# EAGLE board Flowmeter_lpc1113.job (EAGLE 6.3)
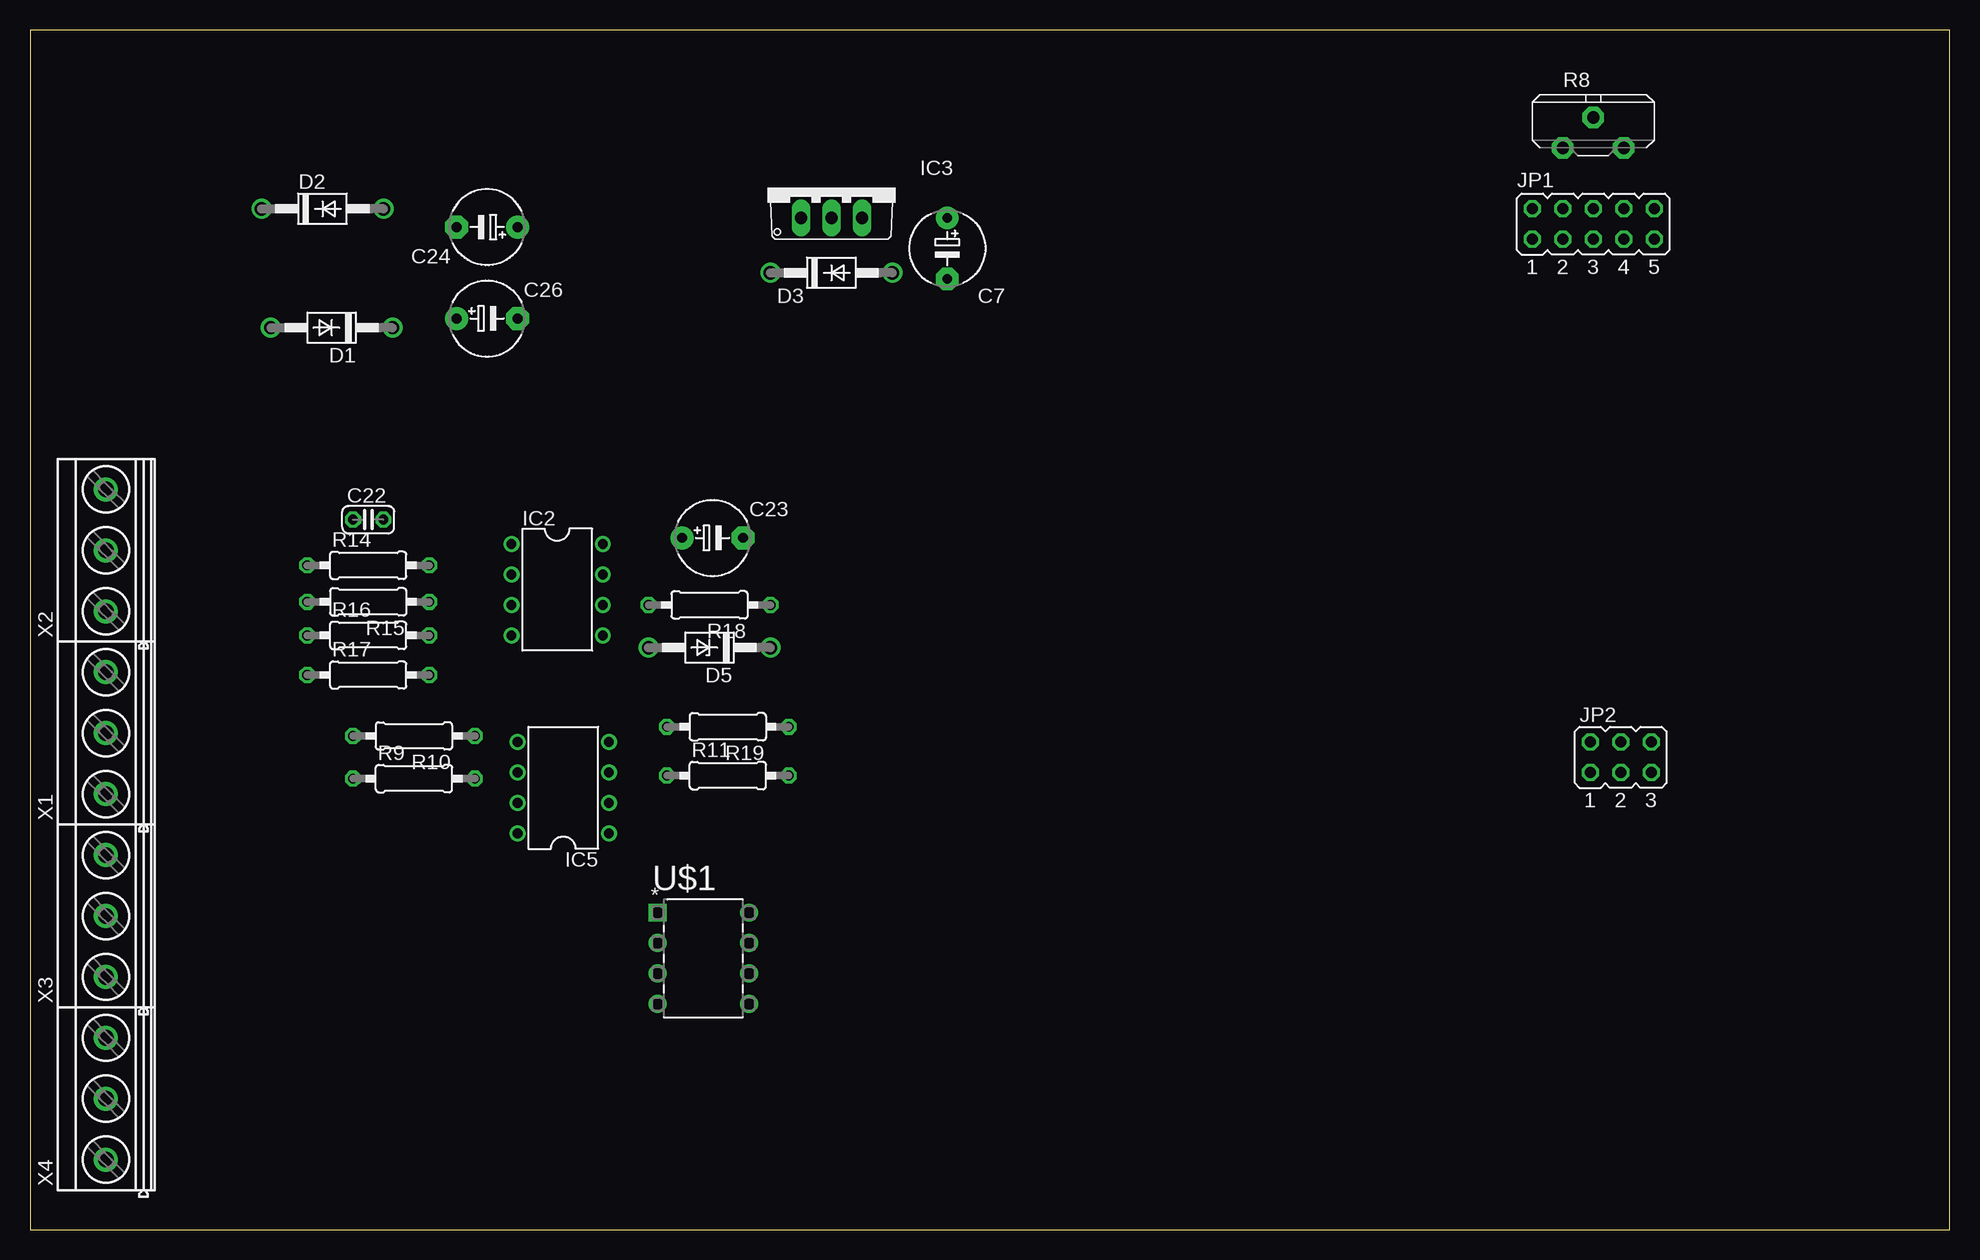
[diagram p0: board, top side]
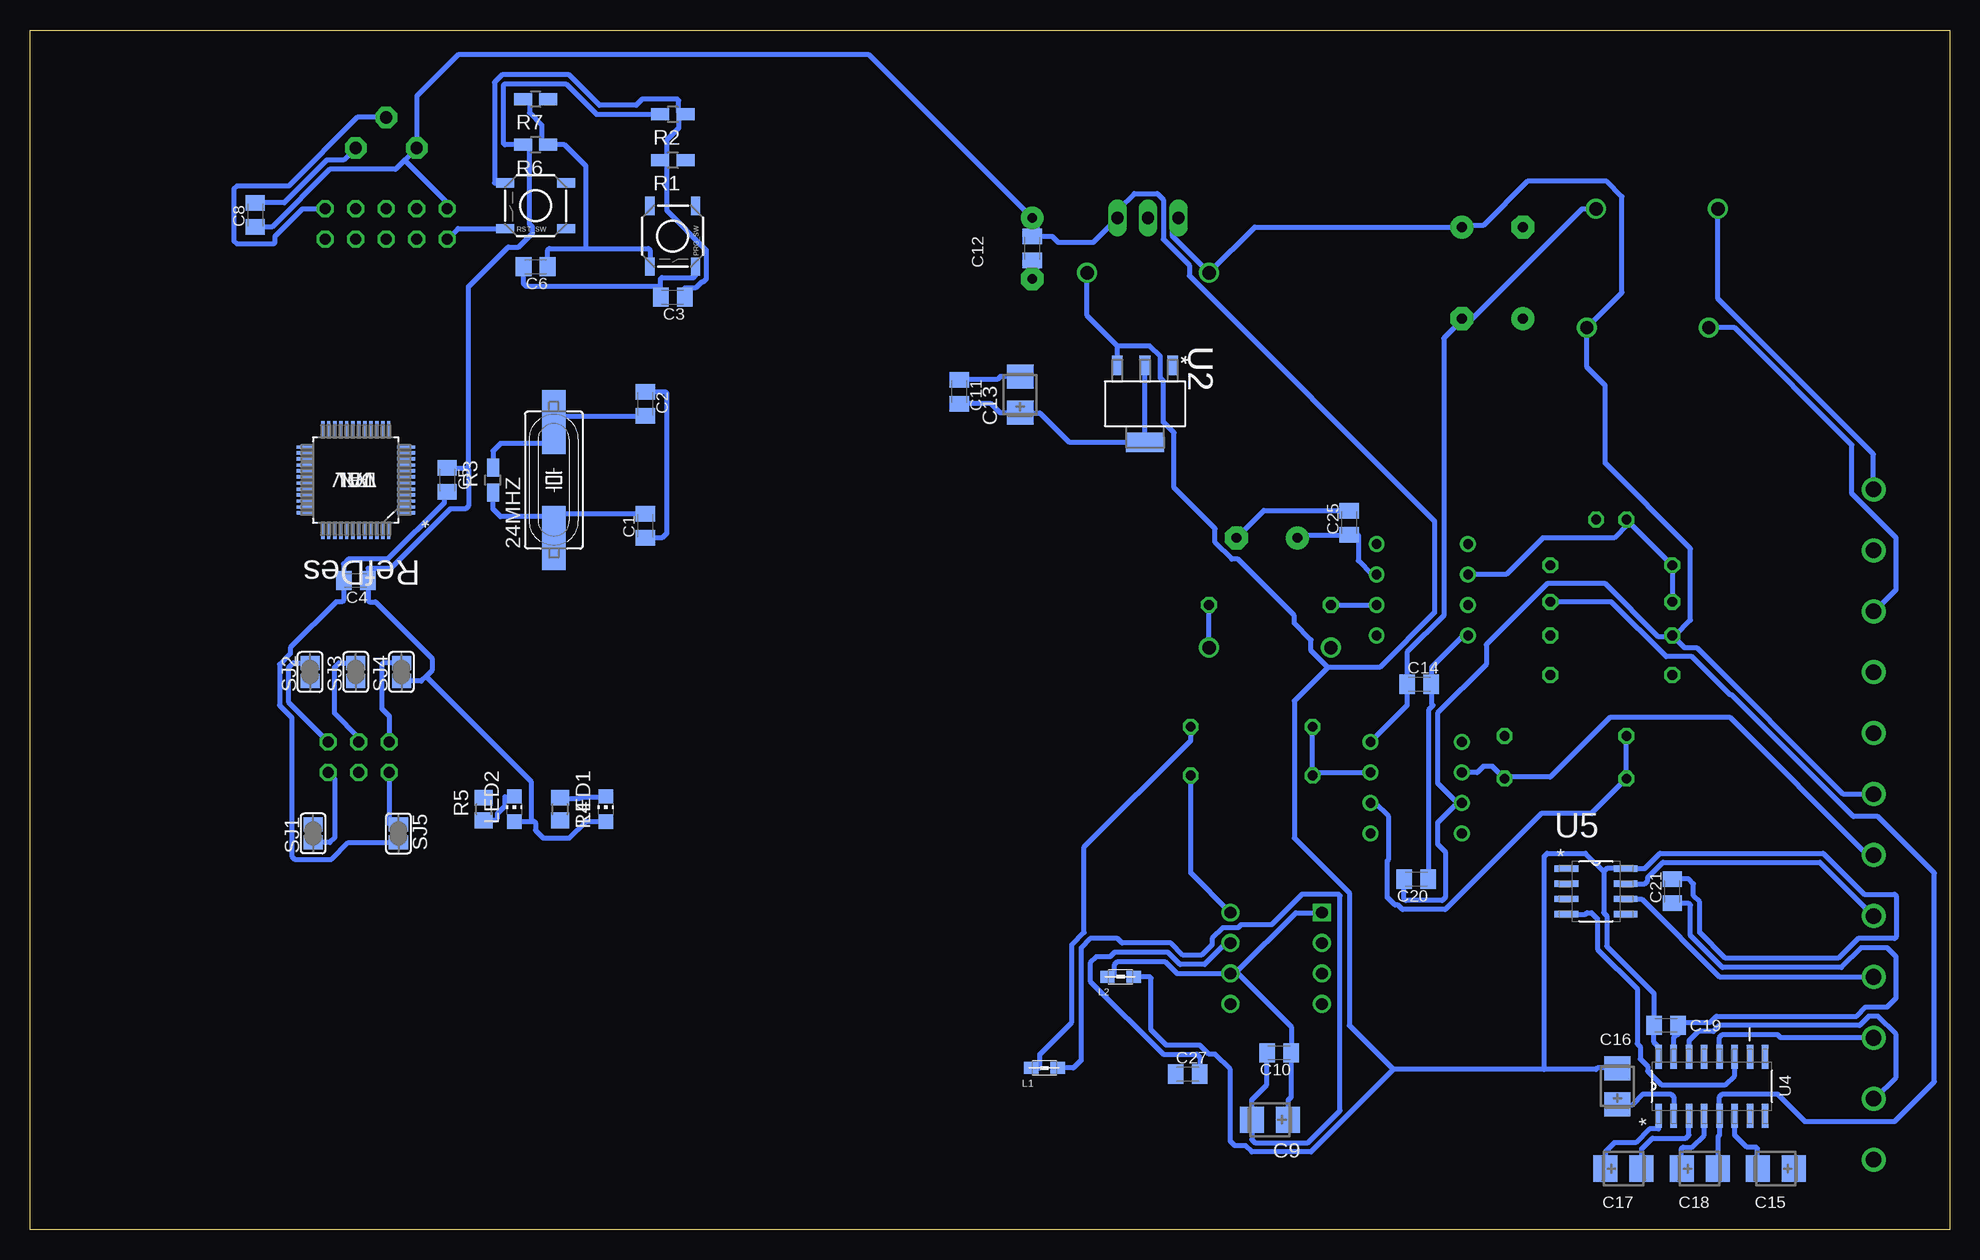
[diagram p1: board, bottom side, seen from below]

Size 160 x 100 mm. Coordinates in mm from the lower left corner, seen from the top.
Outline: 0,0 160,0 160,100 0,100 0,0
Copper layers (1*16): Top 0.035mm / dielectric 1.5mm / Bottom 0.035mm
Design rules "default *": minimum track width 16mil, minimum drill 24mil, track to track 12mil, track to pad 12mil, pad to pad 12mil, via to via 12mil, smd to smd 12mil, copper to edge 40mil, drill to drill 8mil, minimum pad ring 10mil, minimum via ring 8mil, stop-mask expansion 4mil, vias tented up to drill 0mil, thermal gap 10mil

## Footprints (pad centres in the part's own frame; a part is rotated, then mirrored left to right if it is on the bottom)
HC49UP = smd 5.334 x 1.93: 1 -4.826,0; 2 4.826,0
C0805K = smd 1.3 x 1.6: 1 -1,0; 2 1,0
E5-6 = drill 0.813 pad 1.905: + -2.54,0 | drill 0.813 pad 1.905 octagon: - 2.54,0
CT3528 = smd 2 x 2.2: + -1.5,0; - 1.5,0
C025-024X044 = drill 0.813 octagon: 1 -1.27,0; 2 1.27,0
DO41-10 = drill 1.118: A 5.08,0; C -5.08,0
DO41Z10 = drill 1.118: A 5.08,0; C -5.08,0
DIL08 = drill 0.813 pad 1.27: 1 -3.81,-3.81; 2 -1.27,-3.81; 3 1.27,-3.81; 4 3.81,-3.81; 5 3.81,3.81; 6 1.27,3.81; 7 -1.27,3.81; 8 -3.81,3.81
TO220V = drill 1.016 long: 1 -2.54,-2.54; 2 0,-2.54; 3 2.54,-2.54
JP5Q = drill 0.914 octagon: 1 -5.08,-1.27; 2 -5.08,1.27; 3 -2.54,-1.27; 4 -2.54,1.27; 5 0,-1.27; 6 0,1.27; 7 2.54,-1.27; 8 2.54,1.27; 9 5.08,-1.27; 10 5.08,1.27
JP3Q = drill 0.914 octagon: 1 -2.54,-1.27; 2 -2.54,1.27; 3 0,-1.27; 4 0,1.27; 5 2.54,-1.27; 6 2.54,1.27
0805 = smd 1.2 x 1: 1 -1.1,0; 2 1.1,0
CHIP-LED0805 = smd 1.2 x 1.2: A 0,-1.05; C 0,1.05
TACTILE_SWITCH_SMD = smd 1.524 x 0.762: 1 -2.54,1.905; 2 2.54,1.905; 3 -2.54,-1.905; 4 2.54,-1.905
R0805W = smd 1.5 x 1: 1 -1.052,0; 2 1.052,0
R0805 = smd 1.3 x 1.5: 1 -0.95,0; 2 0.95,0
PT-10S = drill 1.016 pad 1.778 octagon: 1 -2.54,-1.27; 2 2.54,-1.27; 3 0,1.27
0207/10 = drill 0.813 octagon: 1 -5.08,0; 2 5.08,0
SJ = smd 1.168 x 1.6: 1 -0.762,0; 2 0.762,0
QFP50P900X900X160-48N = smd 1.473 x 0.279: 1 -4.191,2.743; 2 -4.191,2.261; 3 -4.191,1.753; 4 -4.191,1.245; 5 -4.191,0.762; 6 -4.191,0.254; 7 -4.191,-0.254; 8 -4.191,-0.762; 9 -4.191,-1.245; 10 -4.191,-1.753; 11 -4.191,-2.261; 12 -4.191,-2.743; 25 4.191,-2.743; 26 4.191,-2.261; 27 4.191,-1.753; 28 4.191,-1.245; 29 4.191,-0.762; 30 4.191,-0.254; 31 4.191,0.254; 32 4.191,0.762; 33 4.191,1.245; 34 4.191,1.753; 35 4.191,2.261; 36 4.191,2.743 | smd 0.279 x 1.473: 13 -2.743,-4.191; 14 -2.261,-4.191; 15 -1.753,-4.191; 16 -1.245,-4.191; 17 -0.762,-4.191; 18 -0.254,-4.191; 19 0.254,-4.191; 20 0.762,-4.191; 21 1.245,-4.191; 22 1.753,-4.191; 23 2.261,-4.191; 24 2.743,-4.191; 37 2.743,4.191; 38 2.261,4.191; 39 1.753,4.191; 40 1.245,4.191; 41 0.762,4.191; 42 0.254,4.191; 43 -0.254,4.191; 44 -0.762,4.191; 45 -1.245,4.191; 46 -1.753,4.191; 47 -2.261,4.191; 48 -2.743,4.191
SOT230P700X180-4N = smd 1.626 x 0.889: 1 -3.2,2.311; 2 -3.2,0; 3 -3.2,-2.311 | smd 1.626 x 3.175: 4 3.2,0
SOIC127P600X175-16N = smd 1.981 x 0.533: 1 -2.464,4.445; 2 -2.464,3.175; 3 -2.464,1.905; 4 -2.464,0.635; 5 -2.464,-0.635; 6 -2.464,-1.905; 7 -2.464,-3.175; 8 -2.464,-4.445; 9 2.464,-4.445; 10 2.464,-3.175; 11 2.464,-1.905; 12 2.464,-0.635; 13 2.464,0.635; 14 2.464,1.905; 15 2.464,3.175; 16 2.464,4.445
SOIC127P600X175-8N = smd 1.981 x 0.533: 1 -2.464,1.905; 2 -2.464,0.635; 3 -2.464,-0.635; 4 -2.464,-1.905; 5 2.464,-1.905; 6 2.464,-0.635; 7 2.464,0.635; 8 2.464,1.905
DIP254P762X432-8 = drill 0.991 square: 1 -7.62,7.62 | drill 0.991: 2 -7.62,5.08; 3 -7.62,2.54; 4 -7.62,0; 5 0,0; 6 0,2.54; 7 0,5.08; 8 0,7.62
MKDSN1,5/3-5,08 = drill 1.3 pad 2: 1 -7.641,0.025; 2 -2.561,0.025; 3 2.519,0.025

## Placement (x,y rotation side)
24MHZ  12MHz  [HC49UP]  116.33,62.48 90 bottom
C1  18p  [C0805K]  108.71,58.67 90 bottom
C2  18p  [C0805K]  108.71,68.83 270 bottom
C3  18p  [C0805K]  106.43,77.72 180 bottom
C4  100n  [C0805K]  132.84,54.1 180 bottom
C5  100n  [C0805K]  125.22,62.48 270 bottom
C6  18p  [C0805K]  117.86,80.26 180 bottom
C7  10uF  [E5-6]  76.45,81.79 270 top
C8  100n  [C0805K]  141.22,84.58 90 bottom
C9  10Âµ  [CT3528]  56.64,9.14 180 bottom
C10  100n  [C0805K]  55.88,14.73 180 bottom
C11  100n  [C0805K]  82.55,69.85 270 bottom
C12  100n  [C0805K]  76.45,81.79 90 bottom
C13  10Âµ  [CT3528]  77.47,69.6 90 bottom
C14  100n  [C0805K]  44.2,45.47 0 bottom
C15  [CT3528]  14.48,5.08 180 bottom
C16  [CT3528]  27.69,11.94 90 bottom
C17  [CT3528]  27.18,5.08 0 bottom
C18  [CT3528]  20.83,5.08 0 bottom
C19  100n  [C0805K]  23.62,17.02 180 bottom
C20  100n  [C0805K]  44.45,29.21 180 bottom
C21  100n  [C0805K]  23.11,28.19 90 bottom
C22  100n  [C025-024X044]  28.19,59.18 0 top
C23  100uF/60V  [E5-6]  56.9,57.66 0 top
C24  100uF/60V  [E5-6]  38.1,83.57 180 top
C25  100n  [C0805K]  50.04,58.93 90 bottom
C26  100uF/60V  [E5-6]  38.1,75.95 0 top
C27  100n  [C0805K]  63.5,12.95 0 bottom
D1  1N4004  [DO41-10]  25.15,75.18 180 top
D2  1N4004  [DO41-10]  24.38,85.09 0 top
D3  1N4004  [DO41-10]  66.8,79.76 0 top
D5  3.3V  [DO41Z10]  56.64,48.51 180 top
IC2  OP07CN  [DIL08]  43.94,53.34 270 top
IC3  7805TV  [TO220V]  66.8,86.87 0 top
IC5  OP07CN  [DIL08]  44.45,36.83 90 top
JP1  [JP5Q]  130.3,83.82 0 top
JP2  [JP3Q]  132.59,39.37 0 top
L1  WURTH ELEKTRONIK - 742792095  [0805]  75.44,13.46 0 bottom
L2  WURTH ELEKTRONIK - 742792095  [0805]  69.09,21.08 0 bottom
LED1  [CHIP-LED0805]  112.01,35.05 0 bottom
LED2  [CHIP-LED0805]  119.63,35.05 0 bottom
PRG_SW  [TACTILE_SWITCH_SMD]  106.43,82.8 270 bottom
R1  10k  [R0805W]  106.43,89.15 180 bottom
R2  10k  [R0805W]  106.43,92.96 180 bottom
R3  1M  [R0805W]  121.41,62.48 90 bottom
R4  [R0805]  115.82,35.05 270 bottom
R5  [R0805]  122.17,35.05 90 bottom
R6  10k  [R0805W]  117.86,90.42 180 bottom
R7  10k  [R0805W]  117.86,94.23 180 bottom
R8  [PT-10S]  130.3,91.44 0 top
R9  10k  [0207/10]  32,37.59 0 top
R10  10k  [0207/10]  32,41.15 180 top
R11  10k  [0207/10]  58.17,37.85 0 top
R14  10k  [0207/10]  28.19,55.37 0 top
R15  10k  [0207/10]  28.19,52.32 180 top
R16  10k  [0207/10]  28.19,49.53 0 top
R17  10k  [0207/10]  28.19,46.23 0 top
R18  10k  [0207/10]  56.64,52.07 180 top
R19  10k  [0207/10]  58.17,41.91 180 top
RST_SW  [TACTILE_SWITCH_SMD]  117.86,85.34 180 bottom
SJ1  [SJ]  136.4,33.02 90 bottom
SJ2  [SJ]  136.65,46.48 90 bottom
SJ3  [SJ]  132.84,46.48 90 bottom
SJ4  [SJ]  129.03,46.48 90 bottom
SJ5  [SJ]  129.29,33.02 270 bottom
U1  LPC1113FBD48/302,1  [QFP50P900X900X160-48N]  132.84,62.48 180 bottom
U2  LD1117S33CTR  [SOT230P700X180-4N]  67.06,68.83 270 bottom
U4  MAX232ACSE+  [SOIC127P600X175-16N]  19.81,11.94 90 bottom
U5  MAX485CSA+  [SOIC127P600X175-8N]  29.46,28.19 0 bottom
U$1  MCP4921-E/P  [DIP254P762X432-8]  59.94,18.8 0 top
X1  MKDSN1,5/3-5,08  [MKDSN1,5/3-5,08]  6.35,43.94 90 top
X2  MKDSN1,5/3-5,08  [MKDSN1,5/3-5,08]  6.35,59.18 90 top
X3  MKDSN1,5/3-5,08  [MKDSN1,5/3-5,08]  6.35,28.7 90 top
X4  MKDSN1,5/3-5,08  [MKDSN1,5/3-5,08]  6.35,13.46 90 top

## Library data of the parts
24MHZ = SparkFun2
C1-C27 R1-R8 R14-R18 = rcl
D1-D3 = diode
D5 = ng
IC2 IC3 IC5 = linear
JP1 JP2 SJ1-SJ5 = jumper
L1 L2 = wuerth-elektronik
LED1 LED2 = led
PRG_SW RST_SW = SparkFun1
R9-R11 R19 = resistor
U1 = lpc1113; MPN: LPC1113FBD48/302,1; OC_FARNELL: 2072186; OC_NEWARK: 83T7137; PACKAGE: LQFP-48; SUPPLIER: NXP
U2 = ld1117; MPN: LD1117S33CTR; OC_FARNELL: 2253482; OC_NEWARK: 89K0626; PACKAGE: SOT223-3; SUPPLIER: STMicroelectronics
U4 = maxim; MPN: MAX232ACSE+; OC_FARNELL: 9724362; OC_NEWARK: 52K5506; PACKAGE: SOIC-16; SUPPLIER: Maxim
U5 = maxim; MPN: MAX485CSA+; OC_FARNELL: 9725954; OC_NEWARK: 68K4795; PACKAGE: SOIC-8; SUPPLIER: Maxim
U$1 = microchip; MPN: MCP4921-E/P; OC_FARNELL: 1332112; OC_NEWARK: 08J8743; PACKAGE: DIP-8; SUPPLIER: Microchip
X1-X4 = con-phoenix-508; MPN: SMKDSN1,5/3-5,08; OC_FARNELL: 1792904; OC_NEWARK: 70R0299

## Nets
5V: C7.+ C8.1 C12.2 C16.- C19.2 C21.2 D3.A IC3.3 JP1.2 L2.2 R8.1 U2.3 U4.16 U5.8
5V1: C27.1
+12V: C20.2 C24.+ D1.C D3.C IC3.1 IC5.7 R16.1 X1.1
-12V: C14.1 C26.- D2.A IC5.4
/BOOTLOADER: R7.1 U1.4
/RESET: R1.1 SJ1.2 U1.3
DAC_VOUT: R11.2 U$1.8
GND: C1.1 C2.1 C3.2 C4.2 C5.2 C6.2 C7.- C8.2 C11.1 C12.1 C13.- C14.2 C15.+ C19.1 C20.1 C21.1 C22.2 C23.- C24.- C25.2 C26.+ D5.A IC2.4 IC3.2 JP1.1 L1.1 PRG_SW.2 R8.2 R10.1 R14.2 R17.2 R19.1 RST_SW.2 SJ5.2 U1.5 U1.41 U2.1 U4.15 U5.5 X1.3 X2.2 X4.1
GND1: C27.2 U$1.7
LCD_CONT: JP1.10 R8.3
LCD_D4: JP1.3 U1.1
LCD_D5: JP1.4 U1.11
LCD_D6: JP1.5 U1.12
LCD_D7: JP1.6 U1.24
LCD_EN: JP1.7 U1.43
LCD_R/W: JP1.8 U1.37
LCD_RS: JP1.9 U1.36
LDAC: U1.48 U$1.5
LED1: R4.2 U1.21
LED2: R5.2 U1.20
N$1: LED1.C R4.1
N$2: LED2.C R5.1
N$3: C9.- C10.2 L1.2
N$4: C3.1 R1.2 R2.1 RST_SW.4
N$5: C6.1 PRG_SW.4 R6.1 R7.2
N$6: JP2.5 SJ1.1
N$7: JP2.2 SJ4.2
N$8: JP2.4 SJ3.2
N$9: JP2.6 SJ2.2
N$10: JP2.1 SJ5.1
N$11: C9.+ C10.1 L2.1 U$1.1 U$1.6
N$12: U4.14 X4.2
N$13: U4.12 X4.3
N$14: C17.+ U4.1
N$15: C22.1 IC2.2 R14.1 R15.2
N$16: IC5.2 R9.1 R10.2
N$17: IC5.3 R11.1 R19.2
N$20: D2.C X2.3
N$21: D1.A X2.1
N$22: C23.+ C25.1 IC2.7
N$24: C17.- U4.3
N$26: C18.+ U4.4
N$27: C18.- R15.1 U4.5
N$28: C16.+ U4.2
N$29: C15.- U4.6
N$33: IC5.6 R9.2 X3.3
N$34: U5.6 X3.1
N$36: U5.7 X3.2
N$37: IC2.6 R18.2
N$43: C11.2 C13.+ U2.2 U2.4
N/C: JP2.3
PULSE: D5.C R18.1
RS485_RX_EN: U1.15 U5.2
RS485_TX_EN: U1.14 U5.3
SENSOR_SIGNAL: IC2.3 R16.2 R17.1 X1.2
SPI1_CS: U1.2 U$1.2
SPI1_MISO: U1.26
SPI1_MOSI: U1.38 U$1.4
SPI1_SCK: U1.13 U$1.3
SWDCLK: SJ2.1 U1.29
SWDIO: SJ3.1 U1.39
UART_RX: U1.46 U4.13 U5.1
UART_TX: U1.47 U4.11 U5.4
VCC: C4.1 C5.1 LED1.A LED2.A R2.2 R6.2 SJ4.1 U1.8 U1.44
XTAL_IN: 24MHZ.1 C1.2 R3.1 U1.6
XTAL_OUT: 24MHZ.2 C2.2 R3.2 U1.7

## Tracks (layer width: path | path; a pad name or v marks a point on that pad's centre or on a via)
5V
  Bottom 0.406: U4.16 24.26,15.24 24.64,15.62 24.64,17.02 C19.2 24.64,17.14 24.64,19.68 28.57,23.62 28.57,26.16 28.83,26.42 28.83,29.84 | C21.2 23.11,29.21 21.72,29.21 21.34,28.83 21.34,27.81 20.83,27.3 20.83,24.77 18.67,22.61 9.27,22.61 7.62,24.26 4.57,24.26 4.45,24.38 4.45,27.81 4.57,27.94 7.11,27.94 10.54,31.37 24.13,31.37 25.4,30.1 U5.8 28.57,30.1 28.83,29.84 | L2.2 66.67,21.08 66.55,20.95 66.55,16.64 65.28,15.37 62.48,15.37 61.72,14.61 61.21,14.61 59.94,13.34 59.94,7.37 59.56,6.99 58.67,6.99 58.17,6.48 53.21,6.48 46.35,13.34 | 33.78,13.34 29.46,13.34 29.34,13.46 27.69,13.46 C16.- | 33.78,13.34 46.35,13.34 | 28.83,29.84 30.35,31.37 33.53,31.37 33.78,31.11 33.78,13.34 | 128.78,89.15 R8.1 127.76,94.49 124.33,97.92 90.04,97.92 C7.+ 76.07,83.95 76.07,82.8 76.45,82.8 C12.2 75.95,82.8 74.8,82.8 74.3,82.3 71.37,82.3 IC3.3 69.22,84.45 69.22,85.09 67.94,86.36 66.04,86.36 65.53,85.85 65.53,82.55 63.37,80.39 63.37,79.5 42.93,59.05 42.93,51.44 47.5,46.86 51.82,46.86 | 128.78,89.15 129.54,88.39 135,88.39 139.83,83.57 141.22,83.57 C8.1 | JP1.2 125.22,85.6 128.78,89.15 | D3.A 71.88,76.2 69.34,73.66 | 69.34,73.66 69.34,72.14 U2.3 | 69.34,73.66 66.67,73.66 65.79,72.77 65.79,70.99 65.53,70.74 65.53,67.31 64.64,66.42 64.64,61.85 61.21,58.42 61.21,57.28 59.82,55.88 59.31,55.88 54.61,51.18 54.61,50.55 53.21,49.15 53.21,48.26 51.82,46.86 | 46.35,13.34 50.04,17.02 50.04,28.07 54.61,32.64 54.61,44.07 51.82,46.86
+12V
  Bottom 0.406: IC3.1 64.77,83.82 64.77,82.8 D3.C 57.91,83.57 C24.+ 40.51,83.69 38.86,83.69 35.18,87.38 28.57,87.38 27.3,86.11 27.3,78.11 D1.C 30.23,71.88 28.7,70.36 28.7,63.88 21.59,56.77 21.59,50.8 22.86,49.53 R16.1 | C20.2 45.47,29.21 45.47,27.56 45.34,27.43 42.29,27.43 42.04,27.69 42.04,31.5 42.67,32.13 42.67,33.91 41.02,35.56 IC5.7 41.15,35.69 42.67,37.21 42.67,43.05 38.61,47.12 38.61,48.77 33.53,53.85 28.7,53.85 24.26,49.4 23.24,49.4 R16.1 | R16.1 22.1,48.51 21.08,48.51 8.89,36.32 6.35,36.32 X1.1
-12V
  Bottom 0.406: IC5.4 45.21,43.69 45.21,45.47 C14.1 45.21,45.59 45.21,48.13 42.16,51.18 42.16,74.3 40.64,75.82 C26.- 39.75,75.95 30.61,85.09 D2.A
DAC_VOUT
  Bottom 0.406: R11.2 63.25,29.72 U$1.8
GND
  Bottom 0.406: C5.2 125.22,61.47 125.48,61.47 125.48,60.58 130.18,55.88 133.48,55.88 133.86,55.5 133.86,54.1 C4.2 133.86,53.98 133.86,52.45 133.99,52.32 134.49,52.32 138.3,48.51 138.3,48.01 139.19,47.12 139.19,43.69 138.18,42.67 138.18,31.11 137.92,30.86 134.87,30.86 133.48,32.26 SJ5.2 | C23.- 57.15,59.94 50.04,59.94 C25.2 | C7.- 76.07,79.63 76.07,80.77 76.45,80.77 C12.1 | C11.1 82.55,70.87 79.38,70.87 79.12,71.12 77.47,71.12 C13.- | PRG_SW.2 104.52,79.5 104.65,79.38 107.31,79.38 107.44,79.25 107.44,78.61 | 107.44,78.61 107.44,77.72 C3.2 | 107.44,78.61 118.62,78.61 118.87,78.87 118.87,80.26 C6.2 | C1.1 108.71,57.66 107.31,57.66 106.93,58.04 106.93,69.72 107.06,69.85 108.71,69.85 C2.1 | RST_SW.2 124.33,83.44 JP1.1 | R8.2 133.86,89.15 135.25,89.15 138.81,85.6 141.22,85.6 C8.2 | IC2.4 40.51,49.53 43.18,46.86 43.18,45.47 C14.2 43.18,45.34 43.18,43.81 43.05,43.69 43.43,43.31 43.43,29.21 C20.1 | U4.15 22.99,16 22.73,16.26 22.61,16.26 22.61,17.02 C19.1 22.73,17.14 22.61,17.27 19.94,17.27 19.43,17.78 7.75,17.78 6.99,18.54 5.21,18.54 4.45,19.3 4.45,22.73 5.21,23.5 7.37,23.5 9.02,21.84 18.92,21.84 21.59,24.51 21.59,27.05 21.72,27.18 23.11,27.18 C21.1 | R19.1 63.25,40.77 72.14,31.88 72.14,24.77 73.15,23.75 73.15,17.27 75.82,14.61 75.82,13.46 L1.1
GND1
  Bottom 0.406: U$1.7 60.33,23.88 62.1,22.1 64.14,22.1 65.15,23.11 69.6,23.11 69.98,22.73 71.12,22.73 71.63,22.23 71.63,20.7 65.53,14.61 62.74,14.61 62.48,14.35 62.48,12.95 C27.2
LCD_CONT
  Bottom 0.406: JP1.10 137.29,85.09 139.57,82.8 139.57,82.3 139.7,82.17 142.75,82.17 143,82.42 143,86.74 142.75,87 138.43,87 132.72,92.71 R8.3
N$1
  Bottom 0.406: LED1.C 112.01,36.07 114.05,36.07 114.17,35.94 115.82,35.94 R4.1
N$2
  Bottom 0.406: LED2.C 119.63,36.07 120.4,36.07 120.4,35.31 121.03,34.67 121.03,34.29 121.16,34.16 122.17,34.16 R5.1
N$3
  Bottom 0.406: C10.2 56.9,14.73 56.9,12.06 58.17,10.79 58.17,9.14 C9.- 58.17,9.02 58.17,7.49 57.91,7.24 53.47,7.24 50.8,9.91 50.8,27.81 50.93,27.94 53.98,27.94 56.52,25.4 59.05,25.4 59.31,25.15 60.58,25.15 61.47,24.26 61.47,23.75 62.36,22.86 63.88,22.86 64.9,23.88 68.96,23.88 69.34,24.26 71.63,24.26 72.39,23.5 72.39,14.1 73.03,13.46 L1.2
N$4
  Bottom 0.406: RST_SW.4 121.28,87.25 121.28,95.63 120.65,96.27 115.06,96.27 112.52,93.73 109.47,93.73 108.97,94.23 106.05,94.23 105.92,94.11 105.92,93.09 R2.1 105.79,92.96 105.92,92.84 105.92,91.82 106.93,90.81 106.93,89.28 107.06,89.15 R1.2 106.93,89.03 106.93,84.96 103.63,81.66 103.63,79.25 103.89,78.99 104.01,78.99 104.52,78.49 105.41,78.49 105.41,77.72 C3.1
N$5
  Bottom 0.406: R7.2 118.49,94.23 118.36,94.11 118.36,93.09 117.35,92.08 117.35,90.55 117.22,90.42 R6.1 115.44,90.42 113.67,88.65 113.67,81.79 | PRG_SW.4 108.33,81.66 108.46,81.79 113.67,81.79 | 113.67,81.79 116.71,81.79 116.84,81.66 116.84,80.26 C6.1
N$6
  Bottom 0.406: SJ1.1 135,32.26 134.62,32.64 134.62,37.59 JP2.5
N$7
  Bottom 0.406: JP2.2 130.05,42.8 130.68,43.43 130.68,47.12 130.56,47.24 SJ4.2
N$8
  Bottom 0.406: SJ3.2 134.24,47.24 134.62,46.86 134.62,43.05 132.59,41.02 JP2.4
N$9
  Bottom 0.406: SJ2.2 138.05,47.24 138.43,46.86 138.43,43.94 JP2.6
N$10
  Bottom 0.406: SJ5.1 130.05,33.78 JP2.1
N$11
  Bottom 0.406: C9.+ 55.12,9.14 55.12,10.79 54.86,11.05 54.86,14.73 C10.1 54.86,14.86 54.86,16.89 59.31,21.34 U$1.6 | U$1.6 64.39,21.34 65.41,22.35 69.34,22.35 69.6,22.1 69.6,21.21 69.72,21.08 L2.1 | U$1.1 54.48,26.42 59.44,21.46 59.82,21.46 U$1.6
N$12
  Bottom 0.406: U4.14 21.72,15.75 20.95,16.51 19.68,16.51 19.18,17.02 7.49,17.02 6.73,17.78 5.97,17.78 4.45,16.26 4.45,12.7 6.22,10.92 X4.2
N$13
  Bottom 0.406: U4.12 19.18,16 18.92,16.26 14.35,16.26 14.1,16 6.35,16 X4.3
N$14
  Bottom 0.406: U4.1 24.26,8.38 25.02,8.38 26.16,7.24 27.94,7.24 28.7,6.48 28.7,5.08 C17.+
N$15
  Bottom 0.406: R15.2 R14.1 C22.1 26.8,58.8 27.94,57.66 33.91,57.66 36.96,54.61 IC2.2
N$16
  Bottom 0.406: R10.2 R9.1 29.84,34.67 34.04,34.67 42.04,26.67 45.59,26.67 45.97,27.05 46.23,27.05 46.86,27.69 46.86,30.73 46.74,30.86 46.74,34.42 47.88,35.56 IC5.2
N$17
  Bottom 0.406: IC5.3 52.83,38.1 R11.1 R19.2
N$20
  Bottom 0.406: D2.C 19.3,77.6 6.35,64.64 6.35,61.72 X2.3
N$21
  Bottom 0.406: D1.A 17.91,75.18 8.13,65.41 8.13,61.34 4.45,57.66 4.45,53.34 6.22,51.56 X2.1
N$22
  Bottom 0.406: C23.+ 54.1,57.91 50.04,57.91 C25.1 49.91,57.91 49.28,57.91 49.28,55.75 48.13,54.61 IC2.7
N$24
  Bottom 0.406: U4.3 21.72,7.87 21.97,7.62 24.77,7.62 25.65,6.73 25.65,5.08 C17.-
N$26
  Bottom 0.406: U4.4 20.45,7.87 21.46,6.86 22.23,6.86 22.35,6.73 22.35,5.08 C18.+
N$27
  Bottom 0.406: R15.1 28.19,52.32 23.62,47.75 21.46,47.75 18.29,44.58 18.16,44.58 8,34.42 5.97,34.42 1.27,29.72 1.27,12.32 4.57,9.02 12.06,9.02 14.35,11.3 18.92,11.3 19.18,11.05 U4.5 19.18,7.87 19.3,7.75 19.3,5.08 C18.-
N$28
  Bottom 0.406: U4.2 22.99,11.05 23.24,11.3 25.53,11.3 26.42,10.41 27.69,10.41 C16.+
N$29
  Bottom 0.406: U4.6 17.91,7.87 16.89,6.86 16.13,6.86 16,6.73 16,5.08 C15.-
N$33
  Bottom 0.406: IC5.6 39.37,38.1 38.86,38.61 38.1,38.61 R9.2 36.96,37.72 33.27,37.72 28.32,42.67 18.29,42.67 6.86,31.24 6.35,31.24 X3.3
N$34
  Bottom 0.406: U5.6 25.65,27.56 19.18,21.08 6.35,21.08 X3.1
N$36
  Bottom 0.406: U5.7 25.4,28.83 25.15,29.08 25.15,29.34 23.88,30.61 10.79,30.61 6.35,26.16 X3.2
N$37
  Bottom 0.406: R18.2 IC2.6
N$43
  Bottom 0.406: C11.2 82.55,68.83 79.88,68.83 79.12,68.07 77.6,68.07 C13.+ 77.47,68.07 75.82,68.07 73.41,65.66 67.06,65.66 U2.4 U2.2
PULSE
  Bottom 0.406: D5.C R18.1
UART_TX
  Bottom 0.406: U4.11 17.91,12.83 18.67,12.06 24,12.06 25.15,13.21 25.15,13.59 25.78,14.22 25.78,15.24 26.04,15.49 26.04,20.07 29.34,23.37 29.34,25.91 29.84,26.42 30.23,26.42 30.35,26.29 U5.4
VCC
  Bottom 0.406: R2.2 112.78,92.96 115.32,95.5 120.4,95.5 120.52,95.38 120.52,90.55 120.4,90.42 R6.2 118.36,90.42 118.36,83.82 118.11,83.57 118.11,83.06 119.25,81.92 120.14,81.92 123.44,78.61 123.44,63.63 123.57,63.5 | 118.24,34.04 119.63,34.04 LED2.A | 118.24,34.04 117.98,34.04 117.86,33.91 117.86,33.27 117.22,32.64 115.06,32.64 113.67,34.04 112.01,34.04 LED1.A | 123.57,63.5 123.44,63.37 123.44,60.33 123.7,60.07 124.97,60.07 129.92,55.12 131.83,55.12 131.83,54.1 C4.1 131.83,53.98 131.83,52.45 131.7,52.32 131.19,52.32 126.49,47.62 126.49,46.61 127,46.1 | 123.57,63.5 125.22,63.5 C5.1 | SJ4.1 127.38,45.72 127,46.1 | 118.24,34.04 118.24,37.34 127,46.1
XTAL_IN
  Bottom 0.406: R3.1 121.41,60.07 120.78,59.44 116.46,59.44 116.33,59.31 24MHZ.1 116.2,59.44 115.95,59.69 108.71,59.69 C1.2
XTAL_OUT
  Bottom 0.406: R3.2 121.41,64.9 120.78,65.53 116.46,65.53 116.33,65.66 24MHZ.2 116.33,67.82 108.71,67.82 C2.2